# Altium PCB MiniPCBR3.PcbDoc (part 2 of 2)
Units mil, origin at the board's own origin, x right, y up, seen from the top; angles counter-clockwise.
Board outline 669.97 x 965.45 mil, 4 copper layers (Top Layer, GND, PWR, Bottom Layer), stack 30.2 mil thick; 95 components, 53 nets, 370 pads, 96 vias.
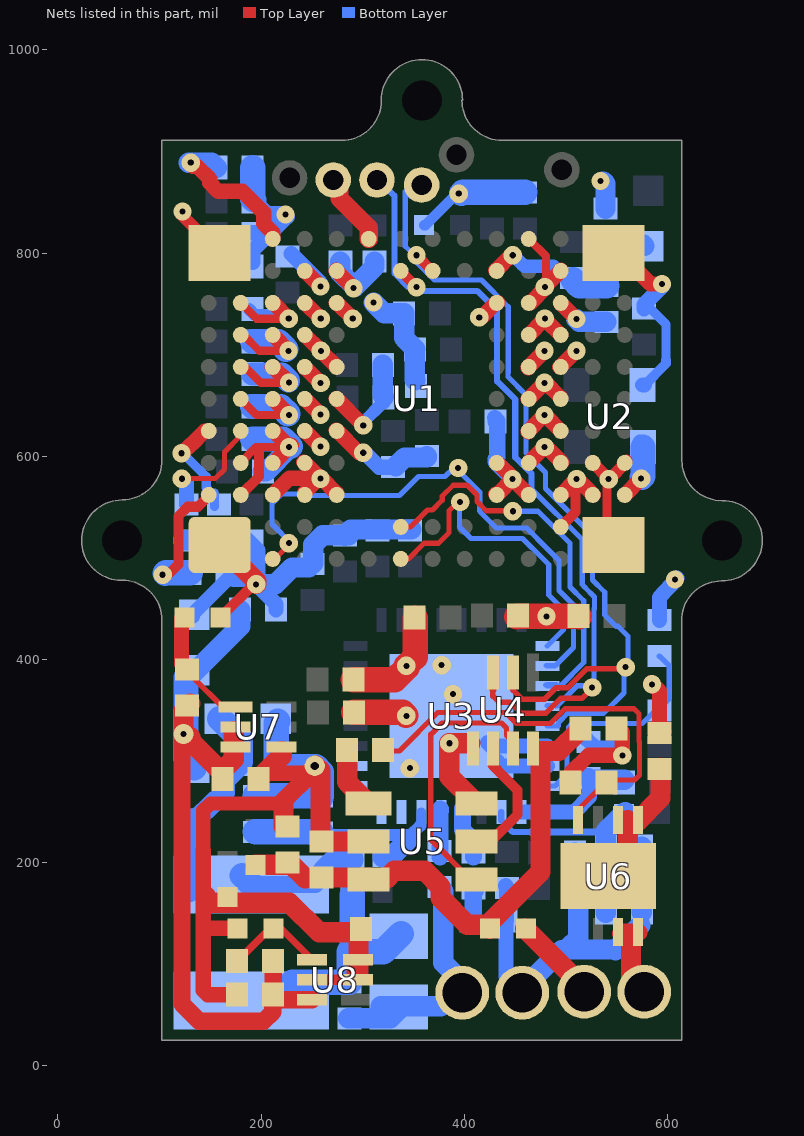
[diagram p4: the nets of this part, all layers, seen from the top]

## Via types
v1: diameter 18, hole 6, Top Layer to Bottom Layer, tented both sides, 94 vias
v2: diameter 20, hole 6, Top Layer to Bottom Layer, tented both sides, 2 vias

## Nets (pads, with @x,y where several pads share a name; then routed paths per layer and width w, separated by ;. In a path a pad name is that pad's centre, name@x,y a point inside that pad or via, vN(x,y) a via of type N, cw(c..) or ccw(c..) an arc to the next point about the centre after c; other vN are vias at no path point) (continued)
GND: C1.0 C2.0 C3.0 C4.0 C5.0 C6.0 C7.0 C8.0 C9.0 C10.0 C11.0 C12.0 C13.1 C14.1 C15.1 C16.1 C17.1 C18.1 C19.0 C20.1 C21.1 C22.1 C23.1 C24.1 C25.1 C26.1 C27.1 C28.1 C29.1 C30.1 C31.1 C32.1 C35.1 C36.0 C37.1 C38.1 C39.1 C41.1 C42.0 C44.1 C45.1 C46.0 C47.0 C48.0 C49.0 C50.0 C51.0 C52.1 C53.1 C54.1 C55.1 C56.1 C57.1 C58.0 C59.1 C60.1 C61.1 C62.1 J1.1 pad.1@271,872 pad.3@252.78,295.35 R2.1 R5.0 R11.0 R12.0 R15.0 R16.0 R17.0 R18.0 R19.0 U1.1-A1 U1.9-A11 U1.10-B3 U1.11-B4 U1.13-B6 U1.14-B7 U1.15-B8 U1.16-B9 U1.19-C3 U1.20-C4 U1.21-C5 U1.22-C6 U1.23-C7 U1.24-C8 U1.25-C9 U1.30-D3 U1.31-D4 U1.32-D5 U1.33-D6 U1.34-D7 U1.35-D8 U1.36-D9 U1.37-D10 U1.41-E3 U1.43-E5 U1.44-E6 U1.45-E7 U1.47-E9 U1.48-E10 U1.54-F11 U1.68-K3 U1.69-K4 U1.74-K9 U1.79-L3 U1.80-L4 U1.81-L5 U1.82-L6 U1.83-L7 U1.84-L8 U1.85-L9 U1.87-L11 U1.89-M2 U1.90-M3 U1.91-M4 U1.92-M5 U1.93-M6 U1.94-M7 U1.95-M8 U1.96-M9 U1.97-M10 U1.99-N3 U1.100-N4 U1.106-P1 U1.108-P4 U1.114-P11 U2.2 U3.6 U3.7 U3.33 U4.5 U5.2 U5.6 U7.4 U8.2 U8.3 U8.5 | length 5654.5
  Top Layer w5.12: U1.14-B7@179.89,687.65 U1.14-B7@179.89,687.99 ; U1.24-C8@211.38,719.49 U1.24-C8@212.22,719.49 ; v1@225.94,703.94 v1@226,704 ; U1.34-D7@242.88,687.83 U1.34-D7@242.88,687.99 ; v1@257.47,642.04 v1@258.81,642.04 ; v1@258.44,609.45 v1@258.66,609.45 ; U1.45-E7@274,687 U1.45-E7@274,688.37 ; U1.45-E7@274.37,687.99 U1.45-E7@275,687.99 ; v1@300.38,630.5 v1(300.5,630.5) ; v1@479.8,734.54 v1@479.8,736.98 ; v1@511.54,734.31 v1@512.56,734.31
  Top Layer w6: v1@509.5,576.5 v1@509.5,581.2
  Top Layer w8: U1.1-A1@175.86,527.18 U1.1-A1@179.89,531.21 ; U1.11-B4@179,593 195,609 v1@227.32,609 ; U1.13-B6@179,657 195.47,640.53 v1(227.35,640.53) ; U1.16-B9@180,751 195.57,735.43 v1(227.17,735.43) ; U1.14-B7@182,690 199.56,672.44 v1(227.39,672.44) ; U1.15-B8@183,719 198.17,703.83 v1(226.89,703.83) ; U1.30-D3@242.88,562.01 U1.30-D3@242.88,564.48 ; v1@446.9,577.06 v1@446.9,578.1 ; U1.87-L11@463.35,813.98 480.23,797.11 480.23,775.27 480,775.04 v1@480,769
  Top Layer w9: v1@542.2,578.5 542.2,576.45 540.47,574.72 540.47,519.35 U1.106-P1@547.01,512.8 ; U1.106-P1@545.8,514.5 U1.106-P1@565.42,494.88
  Top Layer w10: R15.0@160.05,441.19 160.05,441.52 v1@193.73,475.2 ; U1.10-B3@179.89,562.01 197.84,579.96 197.84,605.29 ; U1.20-C4@211.38,593.51 U1.20-C4@212,593.51 ; U1.31-D4@242,594.5 U1.31-D4@242,595 ; U8.5@250,84.72 290.19,84.72 U8.2@293.4,87.93 ; v1@258,578.5 v1(258.5,578) ; U1.41-E3@274.37,562.01 U1.41-E3@274.37,563.53 ; U1.82-L6@463,656 U1.82-L6@463,656.38 ; v1@477,607.16 v1@477,609.5 ; v1(479.07,609.07) v1@480.93,609.07 ; U1.89-M2@494.85,530.51 509.5,545.16 v1@509.5,576.5 ; U1.90-M3@494.85,562.01 U1.90-M3@495.01,562.01 ; U1.93-M6@494.85,656.5 U1.93-M6@494.85,657.65 ; U1.90-M3@495.5,563 U1.90-M3@495.5,563.5 ; v1(510.56,577.57) v1@511.43,577.57 ; U1.114-P11@546.8,800.2 U1.114-P11@547.01,800.2
  Top Layer w11.81: v1@120.95,842.07 120.95,838.47 U1.9-A11@159.22,800.2 ; U1.11-B4@179.89,593.34 U1.11-B4@179.89,593.51 ; U1.100-N4@526.34,593.51 v1@541.78,578.08 ; v1@543.1,577.6 559.5,594 U1.108-P4@559.5,596
  Top Layer w14: 143,212.13 143,251.28 150.05,258.33 217.31,258.33 217.77,257.87 ; 217.84,259.33 241.92,283.41 ; 221.99,258.21 252.88,289.1 252.88,293.21 pad.3@252.88,293.93
  Top Layer w15: 143,212.13 143,74.25 147.16,70.09 C42.0@176.35,70.09 ; 148.99,134.76 149.69,135.46 R16.0@176.58,135.46 ; C41.1@197.55,285.29 200.26,288 202.86,288 244.27,288 pad.3@253.18,296.91 ; U1.23-C7@211,688 211.83,688 v1(227.39,672.44) ; U1.19-C3@211.38,562.01 227.87,578.5 v1@256.9,578.5 ; U1.20-C4@212,593.51 v1@229.57,611.08 ; U1.21-C5@212,625 227.35,609.65 v1(227.35,609.03) ; U1.22-C6@212,656 212,655.89 v1(227.35,640.53) ; U1.24-C8@212,719 212,718.72 v1(226.89,703.83) ; U1.25-C9@212,751 227.17,735.83 v1(227.17,735.43) ; 221.99,262.7 227.7,268.41 ; 227.89,268.22 252.88,293.21 pad.3@254.3,294.63 ; U1.31-D4@242,594.5 v1@258,578.5 ; U1.30-D3@242.88,564.48 v1@256.9,578.5 ; U1.35-D8@242.88,719.49 257.38,705 258,705 258,704.37 274,688.37 U1.45-E7@274.37,687.99 ; U1.32-D5@243,625 v1(258.5,609.5) ; U1.34-D7@243,687 243.71,687 v1(258.62,672.09) ; U1.36-D9@243,751 243.1,751 v1(258.66,735.44) ; U1.37-D10@243,782 243.52,782 v1(258.46,767.06) ; U1.33-D6@244,656 244,655.5 257.47,642.04 v1(258.5,641) ; v1@259.88,578.5 v1@259.4,578.5 ; U1.43-E5@274,626 296.5,603.5 v1(300.5,603.5) ; U1.44-E6@274,657 v1(300.5,630.5) ; U1.47-E9@274,751 274.59,751 v1(290.15,735.44) ; U1.48-E10@274,783 274,782.5 v1(291,765.5) ; U1.41-E3@274.37,563.53 v1@259.4,578.5 ; U8.2@292.24,88.26 291.67,88.83 291.67,104.41 U8.3@295.28,104.41 ; v1(414.66,736.72) 416.72,736.72 431.37,751.37 U1.74-K9@433,751.37 ; U1.68-K3@431,563 433,563 v1(447.5,577.5) U1.79-L3@463,562 ; U1.69-K4@431.85,593.51 432.89,593.51 v1@447.8,578.6 ; U1.81-L5@463,624 463,624.87 v1@478.13,640 ; U1.82-L6@463,656.38 v1(478.91,672.29) ; U1.83-L7@463,687 463,687.87 v1(478.91,703.78) ; U1.80-L4@463.35,593.51 v1@477,607.16 ; U1.84-L8@463.35,719.49 463.49,719.49 v1@477.5,733.5 ; U1.85-L9@463.35,750.99 464.99,750.99 v1@479.94,765.94 ; v1(478.86,640.73) v1@478.13,640 ; v1(479.23,766.65) 479.23,767.23 U1.97-M10@495,783 ; v1@479.5,673 U1.93-M6@494.85,657.65 ; v1@480.93,609.07 U1.91-M4@496,594 ; v1@481,734 481,733.35 U1.95-M8@494.85,719.49 ; U1.94-M7@494,688 509.78,703.78 v1(510.41,703.78) ; U1.92-M5@494.85,625 479.86,640 v1@478.13,640 ; U1.90-M3@495.01,562.01 v1@509.5,576.5 ; U1.96-M9@495,751 495,750.55 v1(510.42,735.13) ; R11.0@504.48,279.1 504.48,288.11 522.12,305.75 v1@555.5,305.75 ; v1@511.43,577.57 U1.99-N3@527,562 ; C37.1@549.52,334.4 555.5,328.42 v1@555.5,305.75 ; U1.114-P11@553.85,799 583.35,769.5 v1(594.5,769.5) ; v1@557.24,305.75 v1@555.5,305.75 ; v1@584,377 592.21,368.79 R12.0@592.21,327.53 ; R12.0@595,330.04 R12.0@596.2,328.84 ; v1@256.9,578.5 v1@258,578.5 ; v1@258,578.5 v1@259.4,578.5
  Top Layer w18: pad.1@277.08,866.66 277.08,853.92 305.87,825.13 U1.54-F11@305.87,813.98
  Top Layer w20: 145.5,166.95 145.5,165.59 150.37,160.72 227.65,160.72 256.96,131.41 C46.0@298,131.41 ; U1.1-A1@168.29,503.76 195.09,476.96 195.09,474.63 v1@195.31,474.85 ; C41.1@197.18,282.32 202.86,288 220.26,305.4 U7.4@220.26,309.96 ; C39.1@221.99,235.57 221.99,258.21 ; pad.3@253.25,295.68 254.3,294.63 258.47,290.46 258.47,220.84 303,220.84 U5.2@303.15,220.99 ; U8.2@295.91,89.04 295.91,127.65 298.26,130 C46.0@298.26,133.08 ; C36.0@350.27,441.65 C36.0@351.94,443.32 ; U4.5@406.04,317.38 405.82,317.6 v1(385.2,317.6) 385.2,284.83 U5.6@408.69,261.34
  Top Layer w25: C45.1@290.82,380.2 331.47,380.2 343.58,392.31 v1@344,392.31 ; C44.1@291.22,348 339.39,348 v1@342.56,344.83 ; v1(342.91,393.7) 351.52,402.31 C36.0@351.52,440.81 ; C6.0@451.69,441.99 452.2,442.5 v1(480.8,442.5) 512.75,442.5 C5.0@513.26,441.99
  Bottom Layer w5.12: v1@298,630 v1@300,630
  Bottom Layer w7: C27.1@442,171.62 C27.1@442,175.28 C27.1@446.69,170.59 ; J1.1@461.49,84.57 J1.1@462.28,83.78 ; J1.1@461.91,76.68 J1.1@465.64,80.41 ; J1.1@463.45,86.52 J1.1@468.01,91.08 ; J1.1@470.5,88.58 J1.1@468.01,91.08 ; J1.1@470.5,93.57 J1.1@468.01,91.08
  Bottom Layer w8: v1@222.81,838.19 v1@223,838 ; v1@223.43,838 v1(224,838)
  Bottom Layer w9: C58.0@580.88,747.47 598.5,729.85 598.5,694.79
  Bottom Layer w10: v1@257.5,608.5 v1(258.5,609.5) v1@259.45,610.45 ; v1@300,630 v1(300.5,630.5) ; v1@310,748.5 v1@310,754.5 ; C17.1@310.28,791.78 C17.1@311.5,793 ; C54.1@321.72,651.72 C54.1@321.72,660 ; R19.0@360.31,827.48 361.47,827.48 v1@393.45,859.46 ; U2.2@577.29,670.05 598.5,691.26 598.5,694.79 ; v1@609.42,480.14 v1@609.42,480.26
  Bottom Layer w12: C50.0@188,745 193.79,739.21 223.39,739.21 v1(227.17,735.43) ; C49.0@191.72,649 191.72,650.72 C49.0@192,651 ; v1@300,633 320.32,653.32 C54.1@320.32,658.1
  Bottom Layer w14: C61.1@132.66,442.28 132.66,444.65 167.64,479.63 C1.0@174.09,479.63
  Bottom Layer w15: C1.0@172.78,481.11 173.51,481.84 178.05,481.84 ; C8.0@190,820 208,820 224,836 v1(224,838) ; C48.0@191.72,791 191.72,802.42 v1@225.3,836 ; C12.0@191.72,853 205.72,839 v1@225,839 ; v1@192.15,473.31 v1@195.09,473.31 ; v1@195.09,474.09 214.72,454.46 C62.1@214.72,449 ; C60.1@214.39,294.82 C60.1@216.55,292.66 ; v1@224.4,837.35 v1@225.95,835.8 ; v1@225.83,609.11 v1@227.23,609.11 ; v1@226.86,703.86 v1@228,705 ; v1@227.23,609.03 v1(227.35,609.03) ; C10.0@229.75,799.25 258.46,770.54 v1(258.46,767.06) ; pad.3@250.96,296.7 pad.3@257.32,290.34 ; C21.1@252.79,493.77 C21.1@253.5,494.48 ; pad.3@253.44,296.58 pad.3@255.75,294.27 ; pad.3@253.55,297.13 pad.3@254.17,296.51 ; C31.1@254.07,264.98 254.86,265.77 C31.1@255.08,265.99 ; C31.1@257.32,264.98 C31.1@257.32,265.77 ; v1@299.4,631.4 v1@301.4,631.4 ; v1(300.5,603.5) v1@301.5,603.5 ; v1@301.64,603.77 316.13,589.28 C13.1@330,589.28 330.72,590 C13.1@332.55,590 ; C15.1@319.72,689.3 C15.1@320,689.02 ; C55.1@348,705 C55.1@350.28,702.72 ; C14.1@350.08,677.92 C14.1@350.28,677.72 ; v1(394.5,858.5) v1@396,858.5 ; U3.33@423,318 426.06,314.94 U3.6@481.61,314.94 ; C53.1@430,638 C53.1@432.92,635.08 ; U3.33@431,301 436.74,295.26 U3.7@481.61,295.26 ; C27.1@440.69,177.42 441.56,176.55 R2.1@441.56,142.86 ; R2.1@440.98,147.43 440.98,88.02 J1.1@457,72 457,77 J1.1@456,77 ; v1@448,578 v1@448,579.12 ; C28.1@508.72,210 C28.1@509.5,209.22 ; C35.1@520,322 529.39,312.61 548.39,312.61 v1(555.5,305.5) ; U2.2@575.5,670.05 U2.2@577.29,670.05 ; C58.0@576.77,745.28 576.77,749.27 v1@595.5,768 ; R5.0@592,438.72 592,461 v1@609.42,480.14
  Bottom Layer w16: C53.1@430.72,634 432.36,632.36 432.36,599.01 430.72,597.37 430.72,594.56 v1@448.28,577
  Bottom Layer w18: C47.0@184.61,517.55 195.09,507.07 v1@195.09,477.04 ; v1(195.09,473.99) 195.09,474.09 v1@195.09,475.42
  Bottom Layer w20: C3.0@123.08,517.51 158.08,517.51 C47.0@182.68,517.28 ; C1.0@172.78,481.11 191.02,481.11 195.09,477.04 v1@196.71,475.42 ; v1@200.3,474.05 214.08,474.05 230.58,490.55 247.03,490.55 C21.1@250.4,493.92 251.27,494.79 251.27,512.86 260.67,522.26 C20.1@282.63,522.26 ; C7.0@201.72,585 204.85,585 v1@229.33,609.48 ; C56.1@278,791.78 278,780.78 292.01,766.77 311.5,786.26 C17.1@311.5,791.78 ; C20.1@282.3,521.93 C20.1@282.63,522.26 ; C20.1@286.32,522.26 C20.1@282.63,522.26 ; v1@310.68,751.3 321.28,740.7 C16.1@340.78,740.7 340.78,716.41 C55.1@351.64,705.55 ; C15.1@319.72,690 319.72,689.3 319.72,659.81 C54.1@320.97,658.56 ; C13.1@332.55,590 341.44,598.89 363,598.89 C52.1@363,600.28 ; C23.1@348.02,527.94 288.31,527.94 C20.1@282.63,522.26 ; C55.1@351.28,705 351.28,675.23 C14.1@351.64,674.87 ; J1.1@470.5,88.58 495.89,113.97 ; 499.63,113.37 500.76,114.5 548.23,114.5 548.76,113.97 573.07,138.28 ; 502.26,116.09 512,125.83 512,171.72 C29.1@508.72,175 ; C28.1@508.72,210 508.72,178.32 C29.1@509.35,177.69 ; v1@510.16,735.16 513.04,732.28 C19.0@540,732.28 ; v1@536.05,870.5 536.89,870.5 539,868.39 R17.0@539,843.72 ; C26.1@574.72,151 C25.1@574.72,183 C24.1@574.72,216
  Bottom Layer w23: C51.0@191.72,681 220.36,681 v1@226.92,674.44
  Bottom Layer w25: C9.0@191.72,617 221.22,617 v1@228.62,609.6 ; C49.0@191.72,649 219.24,649 v1@226.25,641.99 ; C11.0@191.72,713 216.82,713 v1@224.32,705.5 ; C4.0@191.72,884 191.72,853.28 C12.0@192.7,852.3 ; C32.1@194.11,265.77 254.86,265.77 257.32,265.77 C31.1@257.53,265.77 ; C59.1@216.39,339.14 214.76,337.51 C60.1@214.76,297.13 217.39,294.5 pad.3@252.13,294.5 ; pad.3@253.19,294.5 253.85,294.5 259.07,289.28 C31.1@259.07,265.08 ; v1@397.17,858.61 398.32,859.76 C57.1@459.71,859.76
  other v1: 346.35,293.08 342.91,344.49 388.85,365.84 584.8,375.5 377.63,394.41 607.38,478.69 542,577.5 258.76,703.75 479.23,735.65 310.5,751.5 122.5,841 534,871
HORISYNC: U1.55-G1 U3.1 | length 313.9
  Top Layer w5.12: U1.55-G1@337.37,499.02 344.89,499.02 360.32,514.46 374.63,514.46 384.93,524.76 384.93,546.33 v1@394.49,555.89
  Bottom Layer w5.12: v1@395.21,555.37 395.21,530.42 406.41,519.22 457.21,519.22 476.79,499.65 483.1,493.34 483.1,463.62 497.36,449.36 497.36,429.11 U3.1@481.61,413.37
  other v1: 395.92,554.94
NetC1_1: C1.1 U1.2-A3 | length 133.6
  Top Layer w7: U1.2-A3@146.88,560.5 U1.2-A3@148.39,562.01
  Top Layer w10: v1(103.1,483.42) 108.39,483.42 118.71,493.74 118.71,541.28 127.8,550.36 137.82,550.36 U1.2-A3@149.24,561.78
  Bottom Layer w25: v1@105.62,484.83 106.06,485.27 C1.1@130.41,485.27
NetC2_1: C2.1 U1.4-A5 | length 105.7
  Top Layer w15: v1@122.23,603.07 131.37,612.21 131.93,612.21 144.52,624.8 144.52,625 U1.4-A5@148.39,625
  Bottom Layer w9: v1(121.7,603) 122.96,603 145.96,580.01 145.96,569.16 147.72,567.4 147.72,563.69 154.03,563.69 C2.1@154.03,550.5
NetC3_1: C3.1 U1.12-B5 | length 117.5
  Top Layer w5.12: v1@122.91,578.08 154.78,578.08 163.83,587.12 163.83,604.3 179.89,620.37 U1.12-B5@179.89,625
  Bottom Layer w15: v1@121.22,578.81 126.41,573.62 C3.1@126.41,552.64
  other v1: 121.93,577.87
NetC4_1: C4.1 U1.27-C11 | length 160.2
  Top Layer w5.12: U1.27-C11@211.38,813.98 U1.27-C11@211.38,816.8
  Top Layer w10: U1.27-C11@211,811 211.38,811.38 U1.27-C11@211.38,813.98
  Top Layer w15: v1@130.44,888.53 130.44,888 132.94,885.5 136.91,885.5 149.5,872.91 149.5,868.94 157.69,860.75 181.59,860.75 202.5,839.84 202.5,829.09 211.38,820.21 U1.27-C11@211.38,813.98
  Bottom Layer w20: v1@128.51,888.93 151.35,888.93 C4.1@156.28,884
  other v1: 130.74,888.97
NetC19_1: C19.1 R1.0 U1.75-K10 | length 127.7
  Top Layer w13: v1@445.9,797.9 v1(447.6,797.9)
  Top Layer w15: U1.75-K10@431,783 v1@445.9,797.9
  Bottom Layer w13: v1@446.57,799.2 456.82,788.95 457.29,788.95 459.09,787.15 487.72,787.15 499.58,775.28 R1.0@506,775.28
  Bottom Layer w25: R1.0@506.97,773.82 513.07,767.72 C19.1@540,767.72
NetC24_0: C24.0 C25.0 C26.0 L1.2 U3.10 | length 230.5
  Bottom Layer w6: U3.10@436.34,249.98 436.34,241.62 447.79,230.17 468.17,230.17
  Bottom Layer w7: 465.11,230.31 539.28,230.31
  Bottom Layer w12: L1.2@557.14,248.14 L1.2@560,251
  Bottom Layer w20: C26.0@539.32,150.55 539.28,150.59 C26.0@539.28,151 C25.0@539.28,183 C24.0@539.28,216 539.28,230.31 539.28,230.75 L1.2@558.44,249.91
NetC30_0: C30.0 C31.0 C32.0 L2.1 U3.14 | length 215.4
  Bottom Layer w9: C31.0@255.08,226.66 C31.0@257.09,228.67 ; U3.14@357.6,239.5 U3.14@357.6,249.98
  Bottom Layer w12: C31.0@259.07,229.64 259.07,229.49 259.07,227.17 347.39,227.17 356.52,236.3
  Bottom Layer w20: L2.1@319.51,205.47 327.55,205.47 345.25,223.17
  Bottom Layer w25: C32.0@194.11,230.33 258.23,230.33 C31.0@259.07,229.49
NetC33_0: C33.0 U3.13 | length 52.5
  Bottom Layer w10: 377.1,234.81 U3.13@377.1,238.8
  Bottom Layer w17: C33.0@376.02,205.74 376.02,252.47 376.23,252.69 U3.13@376.23,251.24
NetC33_1: C33.1 J1.0 L3.1 R6.0 | length 250.2
  Bottom Layer w20: R6.0@285.79,46.88 326.99,46.88 334.85,54.74 L3.1@334.85,58.11 ; L3.1@317.64,58.64 376.79,58.64 J1.0@391.93,73.78 ; C33.1@375.6,175.93 379.39,172.15 379.39,101.64 J1.0@399.85,81.18 ; J1.0@397.94,72 J1.0@397.94,81.18
NetC34_0: C34.0 U3.12 | length 51.7
  Bottom Layer w17: U3.12@398.23,253 398.23,232.31 409,221.54 C34.0@409,205.72
NetC34_1: C34.1 R2.0 | length 36.3
  Bottom Layer w17: R2.0@408.42,141.72 408.81,142.11 C34.1@408.81,174.81 C34.1@410.98,172.64
NetC35_0: C35.0 R3.1 U3.9 | length 132.5
  Bottom Layer w7: C35.0@520,286 C35.0@523.27,282.73
  Bottom Layer w15: U3.9@456.02,249.98 508.24,249.98 523.27,265.01 523.27,282.01 523.27,282.73 C35.0@523.27,283.19
  Bottom Layer w20: C35.0@522,283.28 523.27,282.01 523.78,281.5 R3.1@557.5,281.5
NetC37_0: C37.0 C38.0 C39.0 R8.0 R9.0 U4.8 U5.3 | length 500.9
  Top Layer w15: C38.0@250.42,186.78 C38.0@258.45,186.78 ; U5.3@311,184 U5.3@313.18,186.18
  Top Layer w20: R8.0@194.59,197.88 228.53,197.88 229.36,198.7 243.51,184.55 ; C38.0@258.47,185.4 U5.3@306.18,185.4 ; U5.3@305.9,183.4 322.4,183.4 331,192 361,192 376.53,176.47 376.53,165.37 402.9,139 R9.0@419,139 ; R9.0@425.28,135 425.28,141.28 475,191 475,310 493,310 C37.0@513,330
NetC59_0: C59.0 C60.0 L4.2 L5.1 R7.1 | length 298.8
  Bottom Layer w17: L4.2@130.18,169.96 L4.2@134.68,174.46 ; L5.1@131.68,234.99 L5.1@133.33,233.34 ; L4.2@190.45,178.46 L4.2@253.46,178.46
  Bottom Layer w20: L5.1@134.33,238.52 134.33,240.73 154.8,261.2 157.01,261.2 164.33,268.52 164.33,280.55 C60.0@178.08,294.3 ; C60.0@179.27,299.16 C60.0@179.56,299.45
  Bottom Layer w22: L4.2@261.38,191.65 270.72,200.99 270.88,200.99 272.7,202.82 289.86,202.82 R7.1@289.86,203.71
  Bottom Layer w25: C59.0@159.39,341.69 179.27,321.81 C60.0@179.27,299.16 ; L4.2@181.53,187.38 L4.2@190.45,178.46
  Bottom Layer w30: L5.1@134.33,238.52 134.33,184.78 L4.2@134.57,184.54
NetD1_C: D1.C R17.1 | length 59.5
  Bottom Layer w5.12: D1.C@572.72,817.28 D1.C@582,808 ; D1.C@578.72,809.28 D1.C@579,809 ; D1.C@580.72,808.78 D1.C@583,806.5
  Bottom Layer w15: D1.C@574.28,808.28 D1.C@577,811
  Bottom Layer w20: R17.1@539,808.28 574.28,808.28 576.07,808.28 D1.C@577.37,806.98
NetJ2_0: J2.0 R9.1 | length 76.2
  Top Layer w20: R9.1@460,135.28 460,135.06 513.06,82 J2.0@514,82
NetJ2_1: J2.1 U6.7 U6.8 | length 79.8
  Top Layer w17: U6.7@554,130 555.54,131.54 U6.8@571.12,131.54 571.28,131.54 U6.8@571.6,131.22
  Top Layer w20: 564,129 564,86 J2.1@577,73
NetL3_2: L3.2 L4.1 R6.1 R7.0 | length 213.7
  Bottom Layer w25: L4.1@216.13,67.86 230.47,82.2 R6.1@286.91,82.2 286.91,111.68 ; 286.54,112.31 320.13,112.31 L3.2@337.85,130.03 ; R7.0@289.86,168.27 289.86,121.04 291.03,119.87
NetR4_0: R4.0 R5.1 U3.8 | length 228.6
  Bottom Layer w5: U3.8@481.61,275.57 489.27,275.57 500.93,287.23 500.93,321.16 502.69,322.92 502.69,333.74 505.99,337.04 575.04,337.04 R4.0@589.86,351.86 ; R4.0@590,352 R4.0@589.86,351.86 ; R4.0@592,349.72 590.86,350.86 R4.0@589.86,351.86
  Bottom Layer w5.5: R4.0@592,352 601.75,361.75 601.75,393.53 R5.1@592,403.28
NetR10_0: R10.0 U5.1 | length 63.1
  Top Layer w20: R10.0@284.77,312.54 284.77,279.33 U5.1@305.9,258.2
NetR10_1: R10.1 R11.1 U6.4 | length 432.1
  Top Layer w5.12: R10.1@312,310 336.09,310 373.81,347.72 440.63,347.72 448.44,339.91 451.46,336.89 484.47,336.89 499.06,351.48 567.13,351.48 572.02,346.59 ; U6.4@512.06,241.78 512.06,252.27 R11.1@536.82,277.03 ; R11.1@538.72,275.12 544.9,281.3 567.5,281.3 572.3,286.1 572.3,319 572.01,319.29 572.01,346.29
NetR12_1: R12.1 U6.1 U6.2 U6.9 | length 125.4
  Top Layer w11.81: U6.9@549.84,187.12 U6.9@555.83,193.1 ; U6.9@566.5,201.5 U6.9@571.87,206.87 ; U6.1@572,244.5 U6.1@575,247.5 ; U6.9@580.5,192 U6.9@581,192.5
  Top Layer w15: R12.1@591.8,293.13 R12.1@592.82,294.15
  Top Layer w20: 560.74,241.78 560.74,204.32 U6.9@562.45,202.61 ; U6.1@569.59,240.02 593.01,263.44 R12.1@593.01,293.42
NetR13_0: R13.0 R15.1 U7.1 | length 110
  Top Layer w5.5: R13.0@133.5,386.15 133.5,381.86 162.22,353.14 U7.1@174.53,353.14
  Top Layer w7: R13.0@121.56,395.64 R13.0@127.02,390.18
  Top Layer w15: R13.0@121.56,395.64 R15.1@121.56,440.67
NetR14_0: R14.0 R16.1 U8.4 | length 93.2
  Top Layer w7: R14.0@178.96,105.49 208.93,135.46 R16.1@212.02,135.46 ; R16.1@216.49,138.3 250,104.79 U8.4@250,104.41
NetU1_56-G10: pad.2 U1.56-G10 U3.4 U4.3 | length 845
  Top Layer w5.12: U1.56-G10@337.37,782.48 U1.56-G10@338.52,782.48
  Top Layer w5.5: 428.11,370 428.11,363.89 433.97,358.03 444.9,358.03 455.73,347.2 480.2,347.2 494.79,361.79 515.79,361.79 v1@527,373
  Top Layer w7: 428.11,370 U4.3@428.11,387.4
  Top Layer w10: U1.56-G10@338,782 338,781.5 v1(353,766.5)
  Bottom Layer w5.12: 466.71,567.29 516,518 516,474 519,471 ; 518,471.65 528,461.65 528,450 ; v1@524,370 527.71,373.71 527.71,450
  Bottom Layer w5.5: U3.4@481.61,354.31 491.31,354.31 511,374 v1@524,374
  Bottom Layer w6: pad.2@317.78,870.03 331.2,856.61 331.2,841.58 331.31,841.47 331.31,780.07 344.88,766.5 v1(353,766.5) 356.63,762.87 412.55,762.87 432.3,743.12 432.3,673.84 450.14,656 450.14,598.9 466.27,582.77 466.27,567.11 469.36,564.02
  other v1: 525.8,372.5
NetU1_60-H10: pad.3@358,867 U1.60-H10 U3.5 U4.2 | length 896.6
  Top Layer w5.5: U4.2@447.8,387.4 447.8,369.98 456.83,360.95 479.1,360.95 490.44,372.29 501.9,372.29 520.61,391 v1@556,391
  Top Layer w10: v1(353.01,797.91) 369,781.93 U1.60-H10@369,780
  Bottom Layer w5.12: pad.3@346.91,855.91 pad.3@358,867 ; pad.3@347.48,866.03 341.87,860.42 341.87,806.81 350.77,797.91 v1(353.01,797.91) ; v1@353.01,797.49 353.01,791.11 370.69,773.43 416.92,773.43 443.15,747.2 443.15,682.41 442.86,682.12 442.86,678.21 460.7,660.37 460.7,603.27 479.92,584.05 479.92,568.39 526.12,522.19 526.12,478.19 538.12,466.19 538.12,443.88 549.35,432.65 551.31,432.65 561.01,422.95 561.01,394.71 v1(558.8,392.5) ; U3.5@481.61,334.63 492.63,334.63 492.63,337.91 501.83,347.1 537.1,347.1 557,367 v1@557,394
NetU1_107-P3: U1.107-P3 U2.3 | length 58.2
  Top Layer w7.87: U1.107-P3@557.84,562.01 U1.107-P3@558.01,562.01
  Top Layer w15: U1.107-P3@558.01,562.01 v1(574,578)
  Bottom Layer w7.87: v1@574,579.94 v1@575.59,578.35
  Bottom Layer w15: U2.3@573,614 U2.3@574,613 ; v1(574,578) v1@574,579.94
  Bottom Layer w25: v1@574.9,579.56 575.82,580.48 U2.3@575.82,609.03
NetU3_15: U3.15
NetU3_16: U3.16
NetU3_17: U3.17
NetU3_18: U3.18 | length 7.4
  Bottom Layer w5.5: U3.18@284.63,295.26 U3.18@292.08,295.26
NetU4_6: U4.6 U5.5 | length 127.9
  Top Layer w5.91: U5.5@397.9,220.8 U5.5@412.2,220.8 ; U4.6@428.11,312.6 U4.6@428.11,314.77 ; U4.6@428.2,298.31 U4.6@428.2,310.4
  Top Layer w10: U5.5@423,220 425,220 452.3,247.3 452.3,271.32 431.89,291.72 431.89,292.11 U4.6@428,296
NetU4_7: U4.7 U5.4 | length 278.8
  Top Layer w5.12: 378,337.6 436.44,337.6 441.58,332.46 441.58,325.22 U4.7@450.2,316.6 ; U4.7@447.4,300 U4.7@447.8,299.6 ; U4.7@447.43,326.77 448.43,326.77 U4.7@451.1,324.1 ; U4.7@447.8,312.6 U4.7@447.8,299.6 ; U4.7@448.2,299.2 U4.7@447.8,299.6
  Top Layer w5.5: 378,337.33 366.98,326.31 366.98,222.57 U5.4@406.16,183.4
PIXCLK: U1.56-G2 U3.3 | length 401.3
  Top Layer w5.12: U1.56-G2@337.37,530.51 347.04,530.51 363.64,547.12 368.63,547.12 378.33,556.82 378.33,560.77 389.06,571.5 401.76,571.5 ; 402.67,571.61 412.48,561.8 412.48,555.37 421.48,546.37 v1@449.29,546.37
  Bottom Layer w5.12: v1(447.7,545.9) 472.34,545.9 503.88,514.36 503.88,471.46 517.6,457.74 ; U3.3@479.83,375.02 U3.3@490.37,375.02 ; U3.3@481.25,375.46 U3.3@490.81,375.46 ; U3.3@481.61,374 494.69,374 517.6,396.91 517.6,456.6
V5P0: C41.0 C42.1 C61.0 C62.0 L5.2 R13.1 R14.1 U7.2 U7.3 U8.6 | length 772.6
  Top Layer w15: C41.0@161.78,287.78 C41.0@161.78,288
  Top Layer w17: v2@122,326.65 122,61.21 139.21,44 202.33,44 211.3,52.97 C42.1@211.3,63.48 ; C42.1@210.26,65.04 U8.6@250,65.04 ; C42.1@211.79,70.09 211.79,104.57 R14.1@212.47,105.25
  Top Layer w20: R13.1@130.34,356.67 123.5,349.83 v2(123.5,326.65) 128.28,321.87 161.23,288.92 C41.0@161.23,288.85 ; C41.0@160.96,288.83 161.08,288.7 C41.0@161.78,288 ; C41.0@162.33,282.56 162.33,291.14 173.06,301.87 U7.2@173.06,329.56
  Bottom Layer w17: C62.0@178,447.75 C62.0@178.24,447.99
  Bottom Layer w20: C61.0@128.54,381.87 179.28,432.61 C62.0@179.28,448.31 ; C61.0@132.92,388.76 C61.0@135.11,388.76
  Bottom Layer w25: C61.0@126,382.32 126,301.85 L5.2@134.33,293.52
VERTSYNC: U1.17-C1 U3.2 | length 547.3
  Top Layer w5.12: U1.17-C1@211.38,499.02 213.37,499.02 v1@225.86,511.51
  Bottom Layer w5.12: v1@230.19,513.76 210.62,533.33 210.62,553.26 220.32,562.96 239.23,562.96 240.75,561.44 336.11,561.44 354.91,580.24 368.63,580.24 381,580.24 v1@390,589.24 ; v1(393.87,588.39) 391.51,588.39 415.1,564.8 415.1,546.13 ; 416.19,544.58 431.43,529.34 461.4,529.34 480.98,509.77 493.21,497.55 493.21,467.81 507.48,453.55 507.48,411.81 496.56,400.89 489.73,394.06 U3.2@480.62,394.06 ; U3.2@481.61,393.68 U3.2@489.35,393.68
  other v1: 227.27,514.55
pads on no net: U1.18-C2 U1.26-C10 U1.49-E11 U1.53-F10 U1.61-H11 U1.65-J11 U1.76-K11 U1.77-L1 U1.78-L2 U1.86-L10 U1.101-N5 U1.102-N6 U1.103-N7 U1.104-N8 U1.105-N9 U1.109-P5 U1.110-P6 U1.111-P7 U1.112-P8 U1.113-P9 U6.3 U6.5 U6.6
copper on no net: | length 41.5
  Top Layer w5.12: 368.86,813.98 383.15,799.7 v1@383.15,798.08 ; v1@449.36,768.68 449.55,768.68 463.35,782.48
  other v1: 448.8,768.45 384.69,798.01

## Polygon pours and split planes (outlines as drawn)
"1.8V VDD" on PWR "1.8V" (solid, remove dead copper, pour order 152): 597.52,905.5 608.24,894.78 608.24,575.51 627.25,555.82 628.97,555.82 628.97,480.51 609.28,460.8 609.28,31.31 492.15,31.31 490.76,32.7 490.76,119.77 470.37,140.16 465.54,144.99 332.5,144.99 332.85,146.02 332.85,301.85 332.85,419.68 413.02,499.85 502.86,499.85 502.86,837.08 470.37,869.57 470.37,905.5
"1.2V VDD" on PWR "1.2V" (solid, remove dead copper, pour order 130): 236.35,304.93 321.93,304.93 323.5,413.36 381.09,470.95 411.14,501 497.22,501 497.22,587.08 497.22,633.4 512.51,837.92 458.94,902.5 414,902.5 396.5,920 323.5,920 300.5,897 242,897 242,819.5 241.5,819 174.54,817.02 165.68,397.82
V5P0 on PWR "5V" (solid, remove dead copper, pour order 146): 148.58,345.34 148.87,139.74 462.83,139.74 488.97,113.6 488.97,30.66 488.97,30.08 108.03,30.08 108.32,345.34
"2.9V VDD" on PWR "2.9V" (solid, remove dead copper, pour order 150): 107.51,905.52 107.32,566.73 86.05,545.66 86.05,480.91 109.07,457.89 109.07,346.72 150.42,346.52 150.23,142.12 325.96,142.12 326.35,142.51 326.35,302.05 233.32,302.05 179.87,355.5 179.87,374.22 168.82,385.27 171.97,820 239.36,824.57 239.36,904.74 238.58,905.52
GND on GND "GND" (solid, remove dead copper, pour order 108): 303,906 328,931 393,931 418,906 598,906 609,895 609,574 630,553 630,480 609,459 609,44 108,44 108,457 85,480 85,555 107,577 107,906

## Keep-outs
Keep-Out Layer:
  lines w1: 191,906 303,906 360.5,963.5 418,906 598,906 609,895 609,593 609,576 616.25,568.75 624.75,560.25 630,555 630,480 610,460 610,30 108,30 108,457 85,480 85,555 102,572 107,577 107,905.82 194.82,905.82 195,906

## Other copper
Top Layer:
  region net GND: 525,895 600,895 603,892 603,574 603,537 597,537 585,603.26 585,835 525,835
  region net GND: 592,569.5 602,559.5 602,536.5 562,536.5 562,539.5

## Silkscreen, mask and mechanical layers (free items; w line width, h text height)
Top Overlay:
  circle w10: c144,365 r0.5
  circle w10: c601,898 r4.24
  circle w10: c119.34,43.38 r4.47
  circle w10: c121.56,296.02 r3.49
  circle w10: c101.6,507.3 r5.86
  circle w10: c487.83,396.38 r4.47
  circle w5: c575.93,268.19 r3
  lines w5: 113.5,366.41 113.5,378.41 ; 136.02,430.53 148.02,430.53 ; 136.54,452.34 148.54,452.34 ; 140.76,365.58 140.76,377.58 ; 156.69,177.84 156.69,189.84 ; 173,295.15 185,295.15 ; 173.26,269.72 185.26,269.72 ; 176.78,178.12 176.78,190.12 ; 188.22,146.77 200.22,146.77 ; 188.91,57.09 200.91,57.09 ; 189.08,125.35 201.08,125.35 ; 189.39,83.36 201.39,83.36 ; 189.65,91.08 201.65,91.08 ; 189.65,117.07 201.65,117.07 ; 212.06,211.83 212.06,223.83 ; 238.59,210.96 238.59,222.96 ; 246.7,197.8 246.7,209.8 ; 266.5,393.5 278.5,393.5 ; 267,368 279,368 ; 267.5,360.2 279.5,360.2 ; 268,336.1 280,336.1 ; 268.5,368.2 280.5,368.2 ; 271.7,198.8 271.7,210.8 ; 296,324.1 308,324.1 ; 297,298.1 309,298.1 ; 309.82,147.61 321.82,147.61 ; 310.03,122.29 322.03,122.29 ; 362,428 374,428 ; 362,455 374,455 ; 373.25,39.78 384.35,39.78 ; 379.25,32.38 379.25,47.28 ; 429.22,455.66 441.22,455.66 ; 430.54,429.58 442.54,429.58 ; 436.03,146.29 448.03,146.29 ; 438.03,124.29 450.03,124.29 ; 467.4,34.32 478,34.32 ; 484.9,28 484.9,101.6 ; 492.5,39.2 503.6,39.2 ; 498.5,31.8 498.5,46.7 ; 516.3,292.4 528.3,292.4 ; 517.3,266.4 529.3,266.4 ; 525,431 537,431 ; 525,455 537,455 ; 526.79,319.02 538.79,319.02 ; 526.78,345.29 538.78,345.29 ; 579.15,307.22 579.15,319.22 ; 590.2,35.2 600.8,35.2 ; 605.2,305.63 605.2,317.63 ; 610.6,102.5 610.6,42.9 610.8,42.7 ; 611,29 611,43
  text "3" at 108.97,876.63 h25
  text "G" at 133.02,877.11 h25
  text "1.2" at 406.28,874.7 h25
  text "1.8" at 524.16,871.34 h25
  text "C" at 158.52,859.31 h25
  text "D" at 184.02,859.31 h25
  text "IMR3-9/19" at 116.55,273.76 h25 r270
  text "G" at 244.63,253.59 h25
  text "DATA" at 377.12,93.12 h25
  text "LED" at 514.25,30.47 h25
Bottom Overlay:
  lines w5: 113.63,529.12 113.63,541.12 ; 139.48,529.29 139.48,541.29 ; 140,366.2 152,366.2 ; 142.14,498.27 154.14,498.27 ; 143.77,472.25 155.77,472.25 ; 145.73,529.13 145.73,541.13 ; 167,668.9 179,668.9 ; 167.05,758.8 179.05,758.8 ; 167.6,661.75 179.6,661.75 ; 167.9,693.85 179.9,693.85 ; 167.9,799.45 179.9,799.45 ; 168,700.3 180,700.3 ; 168.05,733.8 180.05,733.8 ; 168.05,773.8 180.05,773.8 ; 168.05,807.55 180.05,807.55 ; 168.5,832.55 180.5,832.55 ; 168.5,897.05 180.5,897.05 ; 168.65,871.45 180.65,871.45 ; 168.7,839 180.7,839 ; 168.75,635.95 180.75,635.95 ; 168.95,865.65 180.95,865.65 ; 169.05,629.8 181.05,629.8 ; 169.1,725.5 181.1,725.5 ; 169.4,603.8 181.4,603.8 ; 171.76,529.13 171.76,541.13 ; 177.54,529.29 177.54,541.29 ; 178.52,572.24 190.52,572.24 ; 179,597.5 191,597.5 ; 180.79,242.1 180.79,254.1 ; 191.19,284.43 203.19,284.43 ; 191.65,436.3 203.65,436.3 ; 191.65,462.3 203.65,462.3 ; 192.32,310.65 204.32,310.65 ; 203.74,528.29 203.74,540.29 ; 207.01,242.04 207.01,254.04 ; 213.25,773.65 213.25,785.65 ; 213.76,242.36 213.76,254.36 ; 237.05,469.7 237.05,481.7 ; 238.94,242.62 238.94,254.62 ; 239.55,773.2 239.55,785.2 ; 246.73,242.36 246.73,254.36 ; 263.4,469.75 263.4,481.75 ; 264.5,804.4 264.5,816.4 ; 269.4,499.3 269.4,511.3 ; 271.91,242.62 271.91,254.62 ; 274.1,58.41 274.1,70.41 ; 276.47,180 276.47,192 ; 290.5,803.5 290.5,815.5 ; 295,498.9 295,510.9 ; 296.65,677.35 308.65,677.35 ; 296.95,671.5 308.95,671.5 ; 297,702.5 309,702.5 ; 297.85,645.3 309.85,645.3 ; 299.5,803 299.5,815 ; 299.66,58.07 299.66,70.07 ; 302.15,504.25 302.15,516.25 ; 302.7,180.59 302.7,192.59 ; 305.81,86.09 305.81,98.09 ; 308.41,181.45 308.41,193.45 ; 317.75,600.3 317.75,612.3 ; 324,804 324,816 ; 326.85,503.8 326.85,515.8 ; 330.69,181.17 330.69,193.17 ; 334,502.9 334,514.9 ; 342.7,600.5 342.7,612.5 ; 350.45,612.55 350.45,624.55 ; 353,753.2 365,753.2 ; 353.6,727.8 365.6,727.8 ; 358.95,503.6 358.95,515.6 ; 363,187.13 363,199.13 ; 363.65,718.25 375.65,718.25 ; 364.05,656.3 376.05,656.3 ; 364.25,692.6 376.25,692.6 ; 364.95,682.2 376.95,682.2 ; 365.19,87.24 365.19,99.24 ; 371,837 383,837 ; 372.55,41.98 383.65,41.98 ; 373,816 385,816 ; 376.1,611.65 376.1,623.65 ; 378.55,34.58 378.55,49.48 ; 389.18,186.53 389.18,198.53 ; 395.86,185.38 395.86,197.38 ; 407.05,620.9 419.05,620.9 ; 407.25,646.95 419.25,646.95 ; 415,835 415,847 ; 417.64,155.46 429.64,155.46 ; 418.03,130.18 430.03,130.18 ; 422.33,186.19 422.33,198.19 ; 429.5,187.5 429.5,199.5 ; 441,836 441,848 ; 448,837 448,849 ; 455.5,188.5 455.5,200.5 ; 466.4,41 477,41 ; 473,838 473,850 ; 484.8,162.4 496.8,162.4 ; 485.2,42.6 485.2,102.4 485.8,102.4 486.1,102.7 611,102.7 611,43 610.6,42.6 ; 485.8,188.4 497.8,188.4 ; 485.8,197.4 497.8,197.4 ; 485.8,222.4 497.8,222.4 ; 491.05,41.63 502.15,41.63 ; 493.15,786.6 493.15,798.6 ; 497.05,34.23 497.05,49.13 ; 509.25,295.4 509.25,307.4 ; 519.4,787.95 519.4,799.95 ; 525,820 525,832 ; 527.2,744.3 527.2,756.3 ; 534.7,294.9 534.7,306.9 ; 550.8,196.4 562.8,196.4 ; 550.8,203.4 562.8,203.4 ; 550.8,229.4 562.8,229.4 ; 551,170 563,170 ; 551.8,138.4 563.8,138.4 ; 552,164 564,164 ; 552.3,820.5 552.3,832.5 ; 553.05,742.5 553.05,754.5 ; 555.32,897.37 566.42,897.37 ; 561.32,889.97 561.32,904.87 ; 565,722.5 565,734.5 ; 568.8,259.4 580.8,259.4 ; 568.8,266.4 580.8,266.4 ; 568.8,292.4 580.8,292.4 ; 569.8,237.4 581.8,237.4 ; 579,326 579,338 ; 579.7,415.2 579.7,427.2 ; 589,722 589,734 ; 591,39 601.6,39 ; 604.2,415.7 604.2,427.7 ; 605,326 605,338
  lines w10: 126.06,106.92 cw(c121.12,108.21) 126.23,108.21
  text "C" at 317,922 h25 r180
  text "D" at 349,921 h25 r180
  text "12" at 452,885 h20
  text "18" at 518,834 h25
  text "3" at 230.36,823.03 h25
  text "G" at 256.55,822.44 h25
  text "IMR3-9/19" at 605.35,542.26 h25
  text "LED" at 580.79,108.18 h25
  text "DATA" at 460.53,101.86 h20
M1 Board Outline:
  lines w0: 62.32,477.95 cw(c62.32,516.98) 23.28,516.98 cw(c63.33,516.98) 63.33,557.03 ; 63.33,477.95 cw(c63.33,438.92) 102.36,438.92 ; 63.5,557.03 ccw(c62.93,596.46) 102.36,596.46 ; 279.53,911.02 ccw(c279.53,949.71) 318.21,949.71 ; 318.21,950.39 cw(c358.27,950.39) 358.27,990.45 cw(c358.27,950.4) 398.32,950.4 ; 397.64,950.39 ccw(c437.01,950.39) 437.01,911.02 ; 614.17,437.42 ccw(c613.01,437.42) 613.84,438.24 cw(c652.86,438.24) 652.86,477.27 ; 614.17,595.72 ccw(c653.54,595.72) 653.54,556.35 ; 653.2,477.27 ccw(c653.2,517.32) 693.25,517.32 ccw(c654.22,517.32) 654.22,556.35 ; 437.01,911.02 ccw(c437.01,911.02) 437.01,911.02 ; 437.01,911.02 ccw(c437.01,911.02) 437.01,911.02
  lines w0.5: 62.32,477.95 63.33,477.95 ; 63.33,557.03 63.67,557.03 ; 102.36,438.58 102.36,261.41 102.36,25 614.17,25 614.17,39.41 614.17,261.42 614.17,437.42 ; 102.36,596.4 102.36,911.02 279.53,911.02 ; 318.21,949.71 318.21,950.39 ; 398.32,949.71 398.32,950.39 ; 614.17,595.72 614.17,911.02 437.01,911.02 ; 652.86,477.27 653.2,477.27 ; 653.54,556.35 654.22,556.35 ; 398.32,950.39 398.32,950.4 ; 437.01,911.02 437.01,911.02 ; 437.01,911.02 437.01,911.02
M2 Board Dimensions:
  lines w10: -77.29,515.58 22.71,516.06 ; -37.39,535.77 22.71,516.06 ; -37.19,495.77 22.71,516.06 ; 22.66,526.06 22.76,506.06 ; 336.37,85.65 356.18,25.59 ; 338.99,928.39 359.18,988.33 ; 346.18,25.62 366.18,25.56 ; 349.18,988.36 369.18,988.3 ; 356.54,141.08 356.18,25.59 ; 358.82,872.85 359.18,988.33 ; 376.37,85.53 356.18,25.59 ; 378.99,928.27 359.18,988.33 ; 694.68,529.3 694.78,509.3 ; 754.63,539.59 694.73,519.3 ; 754.83,499.59 694.73,519.3 ; 794.73,519.78 694.73,519.3
  text "672.028 (mil)" at 3.53,372 h60 r0.28
  text "962.745 (mil)" at 392.56,150.96 h60 r89.82
M5 Assembly Top:
  text "PIN 1" at 139.92,510.29 h10
  text "U1" at 141,483 h20
  text "C5" at 517.11,432.95 h20
  text "C36" at 344.21,431.71 h20
  text "C6" at 418.13,432.33 h20
  text "R15" at 112,430 h20
  text "PIN 1" at 464.31,407.07 h10 r270
  text "C45" at 248.77,368.87 h20
  text "R13" at 138,350 h20 r90
  text "PIN 1" at 155,349 h10
  text "C44" at 249.5,337 h20
  text "U4" at 427,337 h20
  text "C37" at 508.73,322.74 h20
  text "U7" at 183,319 h20
  text "R10" at 277.26,300.96 h20
  text "R12" at 601.72,285.28 h20 r90
  text "C41" at 157,271 h20
  text "R11" at 497.24,269.09 h20
  text "PIN 1" at 286.5,253.36 h10
  text "U5" at 344,246 h20
  text "PIN 1" at 582.55,226.09 h10 r90
  text "C39" at 233,194 h20 r90
  text "R8" at 205,190 h20 r90
  text "U6" at 518,185 h20
  text "C38" at 269,177 h20 r90
  text "R18" at 178,161 h20 r90
  text "R16" at 177,126 h20
  text "R9" at 417,125 h20
  text "C46" at 295,124 h20
  text "U8" at 284,94 h20 r180
  text "R14" at 171,93 h20
  text "PIN 1" at 316,71 h10 r180
  text "C42" at 163,60 h20
M6 Assembly Bottom:
  circle w10: c121,84 r3.61
  text "C4" at 156.65,873.95 h20
  text "C12" at 150.42,841.74 h20
  text "D1" at 588.5,821.5 h20 r90
  text "R19" at 351.1,814.8 h20
  text "C18" at 437,815 h20 r90
  text "C57" at 468,814 h20 r90
  text "C8" at 158.82,808.76 h20
  text "R17" at 548.28,799.05 h20 r90
  text "R1" at 515.54,787.23 h20 r90
  text "C56" at 289.41,785.16 h20 r90
  text "C17" at 320.28,783.51 h20 r90
  text "C48" at 150.73,775.78 h20
  text "C10" at 237.87,753.19 h20 r90
  text "C50" at 148.09,736.27 h20
  text "C16" at 332.68,731.97 h20
  text "C19" at 549.79,726.59 h20 r90
  text "C11" at 153.07,703.29 h20
  text "C58" at 585.6,699.8 h20 r90
  text "C55" at 343,693.5 h20
  text "PIN 1" at 504.09,687.62 h10 r270
  text "C15" at 277.5,678.5 h20
  text "C51" at 150.42,673.88 h20
  text "C14" at 344.25,659.76 h20
  text "C54" at 272.5,646.93 h20
  text "C49" at 147.47,641.84 h20
  text "U2" at 550,627.3 h20 r90
  text "C53" at 389.45,622.55 h20
  text "C9" at 155.25,607.46 h20
  text "C52" at 374.29,592.24 h20 r90
  text "C13" at 338.46,579.84 h20 r90
  text "C7" at 168.47,574.48 h20
  text "C3" at 169,521 h20 r90
  text "C2" at 138,518 h20 r90
  text "C47" at 197.56,513.34 h20 r90
  text "C23" at 355.83,483.11 h20 r90
  text "C22" at 324.69,482.28 h20 r90
  text "C20" at 292.16,478.97 h20 r90
  text "C1" at 134.09,475.07 h20
  text "C21" at 259.64,453.06 h20 r90
  text "C62" at 172.2,438.35 h20
  text "PIN 1" at 461.43,409.87 h10
  text "R5" at 603,407 h20 r90
  text "C61" at 145.76,394.95 h20 r90
  text "C59" at 163,333 h20
  text "R4" at 603,313 h20 r90
  text "C60" at 171,287 h20
  text "C35" at 530.88,276.38 h20 r90
  text "R3" at 557.94,268.86 h20
  text "L5" at 142,254 h20 r90
  text "L1" at 564.71,238.8 h20
  text "C31" at 267,228 h20 r90
  text "C32" at 200,223 h20 r90
  text "C30" at 237,221 h20 r90
  text "C24" at 531.64,207.23 h20
  text "C28" at 465.5,200.47 h20
  text "L2" at 330,174 h20 r90
  text "C25" at 532.39,173.66 h20
  text "C29" at 463.49,167.9 h20
  text "C27" at 450.71,165.39 h20 r90
  text "R7" at 298,164 h20 r90
  text "C33" at 386.32,159.62 h20 r90
  text "C34" at 415.63,160.38 h20 r90
  text "C26" at 530.38,142.09 h20
  text "R2" at 392.83,129.56 h20
  text "L4" at 197,104 h20 r90
  text "PIN" at 134.43,78.87 h10
  text "L3" at 356,74 h20 r90
  text "R6" at 298,41 h20 r90
M10 Fab Notes:
  text "4 Layer board - Vias are tented" at 667,64 h30
M13 Component Bodies Top:
  lines w5: 118.2,467.2 118.7,467.7
Drill Drawing:
  lines w10: 833.83,328.14 852.89,337.67 871.95,328.14 862.42,347.2 871.95,366.26 852.89,356.73 833.83,366.26 843.36,347.2 833.83,328.14 ; 833.83,413.9 871.95,413.9 871.95,452.02 833.83,452.02 833.83,413.9 ; 833.83,509.2 843.36,509.2 843.36,499.67 862.42,499.67 862.42,509.2 871.95,509.2 871.95,528.26 862.42,528.26 862.42,537.79 843.36,537.79 843.36,528.26 833.83,528.26 833.83,509.2 ; 833.83,594.96 843.36,594.96 852.89,585.43 862.42,594.96 871.95,594.96 862.42,604.49 871.95,614.02 862.42,614.02 852.89,623.55 843.36,614.02 833.83,614.02 843.36,604.49 833.83,594.96 ; 833.83,709.32 871.95,709.32 852.89,671.2 833.83,709.32
  lines w15: 798.3,302.41 7003.52,302.41 ; 798.3,731.24 7003.52,731.24 ; 1126.98,216.64 1126.98,817 ; 1467.08,216.64 1467.08,817 ; 2104.41,216.64 2104.41,817 ; 2407.35,216.64 2407.35,817 ; 2840.62,216.64 2840.62,817 ; 3706.58,216.64 3706.58,817 ; 4057.54,216.64 4057.54,817 ; 4497.66,216.64 4497.66,817 ; 4923.5,216.64 4923.5,817 ; 5425.36,216.64 5425.36,817 ; 6201.58,216.64 6201.58,817 ; 798.3,216.64 7003.52,216.64 7003.52,817 798.3,817 798.3,216.64
  text "Symbol" at 849.76,756.96 h41.17
  text "Count" at 1152.71,756.96 h41.17
  text "Hole Size" at 1492.81,756.96 h41.17
  text "Plated" at 2130.14,756.96 h41.17
  text "Hole Type" at 2433.08,756.96 h41.17
  text "Drill Layer Pair" at 2866.35,756.96 h41.17
  text "Via/Pad" at 3732.31,756.96 h41.17
  text "Pad Shape" at 4083.27,756.96 h41.17
  text "Template" at 4523.39,756.96 h41.17
  text "Description" at 4949.23,756.96 h41.17
  text "Hole Tolerance (+)" at 5451.09,756.96 h41.17
  text "Hole Tolerance (-)" at 6227.31,756.96 h41.17
  text "1" at 1152.71,671.2 h34.31
  text "8.00mil (0.203mm)" at 1492.81,671.2 h34.31
  text "PTH" at 2130.14,671.2 h34.31
  text "Round" at 2433.08,671.2 h34.31
  text "Top Layer - Bottom Layer" at 2866.35,671.2 h34.31
  text "Pad" at 3732.31,671.2 h34.31
  text "Rounded" at 4083.27,671.2 h34.31
  text "c51h20" at 4523.39,671.2 h34.31
  text "3" at 1152.71,585.43 h34.31
  text "39.37mil (1.000mm)" at 1492.81,585.43 h34.31
  text "NPTH" at 2130.14,585.43 h34.31
  text "Round" at 2433.08,585.43 h34.31
  text "Top Layer - Bottom Layer" at 2866.35,585.43 h34.31
  text "Pad" at 3732.31,585.43 h34.31
  text "Rounded" at 4083.27,585.43 h34.31
  text "c0hn100" at 4523.39,585.43 h34.31
  text "4" at 1152.71,499.67 h34.31
  text "39.00mil (0.991mm)" at 1492.81,499.67 h34.31
  text "PTH" at 2130.14,499.67 h34.31
  text "Round" at 2433.08,499.67 h34.31
  text "Top Layer - Bottom Layer" at 2866.35,499.67 h34.31
  text "Pad" at 3732.31,499.67 h34.31
  text "Rounded" at 4083.27,499.67 h34.31
  text "c135h99m135" at 4523.39,499.67 h34.31
  text "6" at 1152.71,413.9 h34.31
  text "20.00mil (0.508mm)" at 1492.81,413.9 h34.31
  text "PTH" at 2130.14,413.9 h34.31
  text "Round" at 2433.08,413.9 h34.31
  text "Top Layer - Bottom Layer" at 2866.35,413.9 h34.31
  text "Pad" at 3732.31,413.9 h34.31
  text "Rounded" at 4083.27,413.9 h34.31
  text "c89h51" at 4523.39,413.9 h34.31
  text "96" at 1152.71,328.14 h34.31
  text "6.00mil (0.152mm)" at 1492.81,328.14 h34.31
  text "PTH" at 2130.14,328.14 h34.31
  text "Round" at 2433.08,328.14 h34.31
  text "Top Layer - Bottom Layer" at 2866.35,328.14 h34.31
  text "Via" at 3732.31,328.14 h34.31
  text "Rounded" at 4083.27,328.14 h34.31
  text "(Mixed)" at 4523.39,328.14 h34.31
  text "110 Total" at 1152.71,242.37 h34.31
M17 Board Outline:
  lines w0.5: 102.36,411.02 614.17,411.02 ; 117.36,426.02 117.36,891.02 600.36,891.02 600.36,426.02 117.36,426.02 ; 232.36,531.02 480.36,531.02 480.36,591.02 480.36,771.02 480.36,781.02 458.36,781.02 232.36,781.02 232.36,601.02 232.36,531.02